# Altium PCB IG-2.PCBDOC (part 3 of 3)
Units mil, origin at the board's own origin, x right, y up, seen from the top; angles counter-clockwise.
Board outline 1834.65 x 964.57 mil, 4 copper layers (Top, GND Plane, Mid1-Ver, Bottom), stack 61.6 mil thick; 34 components, 46 nets, 345 pads, 276 vias.
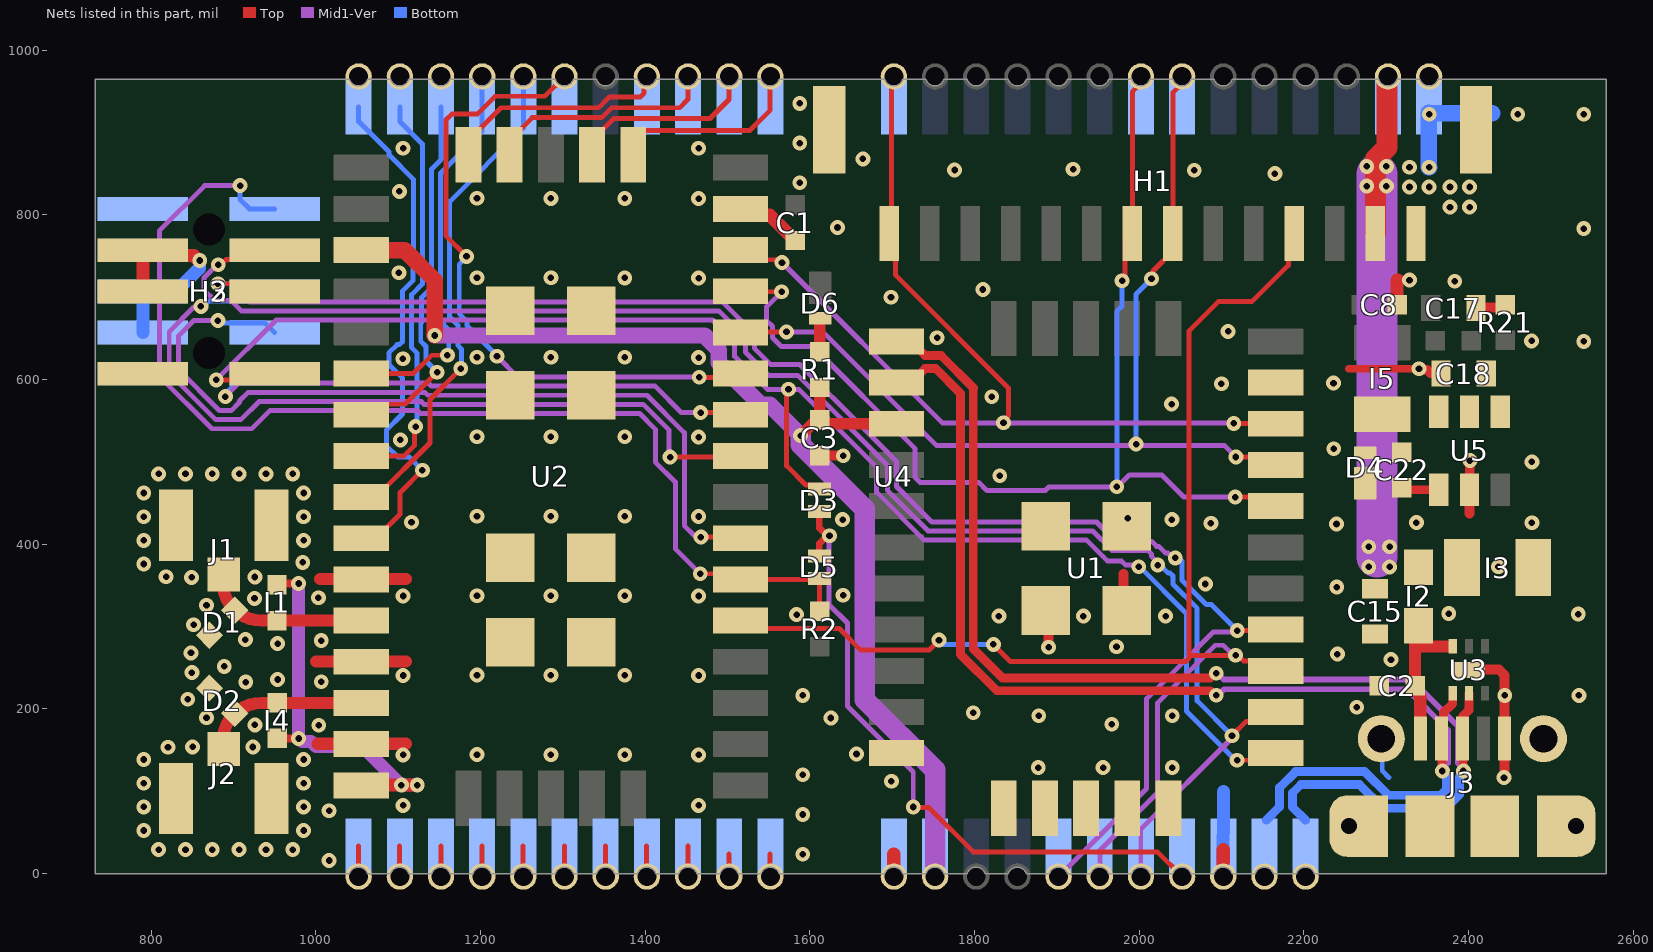
[diagram p4: the nets of this part, all layers, seen from the top]

## Via types
v1: diameter 18, hole 8, Top to Bottom, 276 vias

## Nets (pads, with @x,y where several pads share a name; then routed paths per layer and width w, separated by ;. In a path a pad name is that pad's centre, name@x,y a point inside that pad or via, vN(x,y) a via of type N, cw(c..) or ccw(c..) an arc to the next point about the centre after c; other vN are vias at no path point) (continued)
G12/SWO: H2.6 U1.15 U4.19 | length 1976.4
  Top w6: v1(881.08,716.35) 940.81,716.35 H2.6@950.08,707.09 ; v1(2119.1,295.21) 2171.56,295.21 U1.15@2172.68,296.33
  Mid1-Ver w6: v1(881.08,716.35) 897.43,716.35 919.39,694.38 1493.73,694.38 1532.59,655.52 1532.59,638.06 1552.55,618.11 1587.88,618.11 1665.12,540.87 1705.16,500.83 1705.16,470.1 1748.18,427.08 1948.08,427.08 1971.63,403.53 2015.03,403.53 2021.12,397.44 2023.74,397.44 2032.04,389.15 2034.75,389.15 2040.43,383.46 v1(2043.68,383.46) ; U4.19@1902.09,-3.54 2009.03,103.4 2009.03,212.48 2090.26,293.71 2117.6,293.71 v1(2119.1,295.21)
  Bottom w6: 2052.08,379.95 2052.08,356.07 2081.37,326.79 2087.52,326.79 v1(2119.1,295.21)
G14/SWCLK: H2.4 U1.13 U4.21 | length 1979.5
  Top w6: v1(881.46,739.35) 884.71,739.35 890.94,745.59 938.58,745.59 H2.4@950.08,757.09 ; v1(2112.65,167.51) 2112.65,167.84 2129.39,184.58 2160.93,184.58 U1.13@2172.68,196.33
  Mid1-Ver w6: v1(881.46,739.35) 880.03,739.35 864.08,723.39 864.08,709.31 877.04,696.35 896.57,696.35 909.53,683.38 1489.18,683.38 1521.59,650.97 1521.59,633.5 1549.91,605.19 1585.24,605.19 1694.16,496.28 1694.16,465.54 1743.62,416.08 1943.52,416.08 1967.07,392.53 2010.48,392.53 2014.72,388.29 2014.72,385.67 2022.39,378 v1(2022.39,374.75) ; U4.21@2001.86,-3.54 2001.86,54.01 2112.65,164.8 v1(2112.65,167.51)
  Bottom w6: v1(2022.39,374.75) 2025.64,374.75 2035.43,364.96 2037.57,364.96 2041.08,361.44 2041.08,351.52 2070.33,322.27 2070.33,209.82 v1(2112.65,167.51)
GND: C1.2 C2.2 C3.2 C8.2 C15.2 C17.2 C18.2 D1.2 D2.2 D4.A H1.0 H1.1 H2.3 H2.5 H2.9 H3.3 H3.5 H3.9 J1.2 J1.3 J2.2 J2.3 J3.5 J3.6 J3.7 J3.8 J3.9 R21.1 U1.0 U1.11 U1.21 U1.23 U1.24 U1.25 U1.26 U1.27 U2.0 U2.11 U2.13 U2.15 U2.31 U3.7 U4.1 U4.15 U4.23 U4.37 U4.38 U4.39 U4.40 U4.41 U4.42 U4.43 U4.44 U4.45 U4.46 U4.47 U5.2 | length 1833.7
  Top w6: U4.37@1051.86,6.3 1051.86,33.86 ; U4.38@1101.86,6.3 1101.86,33.86 ; U4.39@1151.86,6.3 1151.86,33.86 ; U4.40@1201.86,6.3 1201.86,33.86 ; U4.41@1251.86,6.3 1251.86,33.86 ; U4.42@1301.86,6.3 1301.86,33.86 ; U4.43@1351.86,6.3 1351.86,33.86 ; U4.44@1401.86,6.3 1401.86,33.86 ; U4.45@1451.86,6.3 1451.86,33.86 ; U4.46@1501.86,-3.54 1501.86,24.02 ; U4.47@1551.86,-3.54 1551.86,24.02 ; v1@1655.85,144.52 v1(1656.62,145.29)
  Top w9: 2254.36,613.08 v1@2342.63,613.08
  Top w11.81: v1(2339.75,613.08) 2340.94,611.89 2349.91,611.89 2353.85,607.95
  Top w12: C3.2@1611.89,507.71 1640.32,507.71 v1(1640.55,507.48) ; U1.0@1886.26,319.57 1889.92,315.89 v1(1889.92,274.85) ; U1.0@1981.02,323.22 1981.02,364.27 ; U3.7@2400.37,247.46 2400.83,247.92 2436.71,247.92 2443.74,240.89 v1@2443.74,124.74 ; 2401.09,437.33 U5.2@2401.09,466.22 2401.32,466.45 2401.32,501.41 v1(2401.55,501.65) ; C17.2@2408.96,686.69 2409.95,687.68 2443.41,687.68 R21.1@2444.4,688.66
  Top w14.88: 1000.39,257.78 1109.25,257.78 ; 1001.97,157.78 1109.25,157.78 ; 1005.51,357.78 1109.25,357.78
  Top w16: H2.5@790.08,707.09 790.08,750.83 H2.3@790.08,757.09 796.58,750.59 851.78,750.59 857.32,745.04 858.7,745.04 v1(859.08,744.65) ; U2.31@1515.8,807.31 1523.55,799.56 1551.23,799.56 C1.2@1582.09,768.7 ; U4.15@1701.86,-3.54 1701.86,24.02 ; U4.23@2101.86,-3.54 2101.95,29.11 ; C8.2@2313.17,690.61 2313.17,720.74 2313.9,720.74
  Bottom w6: J3.6@2295.12,154.69 2295.12,124.79 2303.32,116.59
  Bottom w16: H3.3@790.08,657.09 H3.5@790.08,707.09 830.58,707.09 858.7,735.2 858.7,744.27 v1(859.08,744.65) ; U4.23@2101.86,-3.54 2102.14,99.62
  Bottom w20: v1(2351.99,857.77) 2351.86,857.9 2351.86,924.21 2352.73,923.34 2428.62,923.34
  other v1: 1016.19,15.96 1591.34,23.62 809.13,29.16 841.73,29.16 874.33,29.16 906.93,29.16 939.53,29.16 972.13,29.16 791.02,52.36 985.21,52.36 1591.34,71.85 1016.19,76.39 791.02,81.1 985.21,81.1 1106.02,82.95 1464.96,82.95 791.02,109.84 985.21,109.84 1699.04,112.21 2443.02,116.68 1591.34,120.08 1877.38,128.72 1956.12,128.72 2040.03,128.72 791.02,138.58 985.21,138.58 1106.02,144.15 1285.49,144.49 1375.23,144.43 1464.96,144.15 1195.75,144.54 820.47,153.54 850.39,153.94 923.65,153.75 1003.49,180.29 925.98,180.71 1966.61,181.37 867.32,189.37 1625.52,188.99 1877.93,191.82 2040.03,191.83 1798.48,195.36 2264.13,202.07 844.49,211.81 2443.85,216.45 2533.91,216.45 1591.34,216.54 914.96,232.68 1006.69,233.07 953.6,235.83 1106.02,240.66 1195.75,241.06 1285.49,241 1375.23,240.94 1464.96,240.66 849.61,244.09 888.76,251.7 2305.75,259.95 2240.64,266.61 848.43,268.11 1972.44,275.59 953.6,279.44 1006.69,283.07 914.57,284.25 851.57,302.36 1829.51,312.73 1932.15,312.73 2032.06,312.73 1583.86,314.57 2533.21,315.23 2375.99,315.88 867.32,325.98 925.59,334.25 1003.15,335.04 1106.02,337.18 1375.23,337.46 1464.96,337.18 1195.75,337.57 1285.49,337.51 1640.32,338.12 2239.91,347.97 2080.42,351.78 849.21,359.84 926.06,360.24 818.19,360.66 2436.11,372.81 791.02,376.01 984.25,377.95 791.02,404.75 985.21,404.75 2086.99,425.46 2239.55,424.61 2336.54,426.26 2476.92,426.21 1116.27,426.65 1639.76,429.92 2039.72,429.93 1985.98,431.53 791.02,433.49 985.21,433.49 1195.75,434.08 1285.49,434.03 1375.23,433.97 1464.96,433.69 791.02,462.23 985.21,462.23 1830.52,483.25 809.13,485.43 841.73,485.43 874.33,485.43 906.93,485.43 939.53,485.43 972.13,485.43 2476.92,500.11 2236.13,516.08 1102.76,526.77 1375.23,530.48 1464.96,530.2 1195.75,530.6 1285.49,530.54 2039.31,570.23 1820.91,579.08 2099.8,594.89 2235.91,595.74 1105.77,625.36 1195.75,627.11 1285.49,627.05 1375.23,627.05 1464.96,626.72 2539.77,646.42 2476.53,646.94 1754.59,650.84 2107.88,658.55 1698.58,700.04 1810.14,709.39 2383.13,719.4 2328.2,720.86 1464.96,723.23 1195.75,723.62 1285.49,723.57 1375.23,723.51 1100.88,729.85 2539.77,783.29 1633.54,784.73 2377.43,809.47 2401.22,809.47 1195.75,820.13 1285.49,820.08 1375.23,820.02 1464.96,819.74 1101.55,828.47 2328.21,833.87 2351.99,833.87 2377.43,833.87 2401.22,833.87 1587.8,838.98 2164.71,850.21 2066.71,854.11 1775.74,854.54 1919.71,855.41 2328.21,857.77 1664.44,867.98 1106.02,880.94 1464.96,880.94 1587.8,887.2 2352.15,922.13 2459.72,922.13 2539.77,922.13 1587.8,935.43
GNSS1_ANT: D1.1 I1.2 J1.1 U2.12 | length 204
  Top w14.88: J1.1@886.76,363.19 886.76,354.55 ccw(c934.01,354.55) 934.01,307.3 U2.12@1055.18,307.3
GNSS1_PPS: H1.14 U1.20 U2.30 U4.14 | length 1228.5
  Top w6: U2.30@1515.8,757.31 1527.55,745.56 1560,745.56 1563.44,742.13 v1(1566.14,742.13) ; U4.14@1701.87,966.09 1699.1,963.32 1699.1,780.38 H1.14@1696.33,777.61 1704.14,769.8 1704.14,726.75 1841.21,589.68 1841.21,556.2 1835.2,550.18 v1(1835.2,547.47) ; v1(2114.78,546.84) 2172.17,546.84 U1.20@2172.68,546.33
  Mid1-Ver w6: v1(1566.14,742.13) 1760.8,547.47 v1(1835.2,547.47) 1835.27,547.4 v1@2114.78,547.4 ; U4.14@1701.37,967.39 U4.14@1702.09,968.11
GNSS2_ANT: D2.1 I4.2 J2.1 U2.14 | length 204
  Top w14.88: J2.1@886.76,151.41 886.76,160.06 cw(c934.01,160.06) 934.01,207.3 U2.14@1055.18,207.3
GNSS2_PPS: H1.4 U1.14 U2.21 U4.20 | length 1650.7
  Top w6: U2.21@1515.8,307.31 1525.54,297.57 1635.94,297.57 1662.01,271.49 1744.72,271.49 v1(1756.81,283.58) ; v1(1822.83,278.35) 1843.7,257.48 2056.55,257.48 2060.68,261.61 2060.68,265.12 2060.68,659.2 2096.05,694.57 2136.77,694.57 2181.01,738.81 2181.01,770.16 H1.4@2188.46,777.61 ; 2061.68,265.12 2119.7,265.12 2126.74,258.08 2154.04,258.08 U1.14@2165.79,246.34
  Mid1-Ver w6: U4.20@1952.09,-3.54 1952.09,28.07 2022.03,98.02 2022.03,207.09 2092.34,277.39 2102.02,277.39 2114.29,265.12 v1(2116.99,265.12)
  Bottom w6: v1(1756.81,283.58) 1762.04,278.35 v1(1822.83,278.35)
GPX_G5/SCLK: U2.9 U4.32 | length 614.6
  Top w6: U2.9@1055.18,457.31 1072.89,457.31 1138.65,523.07 1138.65,575.83 v1(1176.11,613.28)
  Bottom w6: v1(1176.11,613.28) 1176.84,614.02 1176.84,637.21 1172.49,641.56 1172.49,666.13 1162.55,676.07 1162.55,816.13 1252.09,905.66 U4.32@1252.09,931.1 U4.32@1252.09,954.72 U4.32@1252.09,968.11
GPX_G6/Rx1/MOSI: U2.6 U4.33 | length 464.8
  Top w6: U2.6@1055.18,607.3 1118.55,607.3 1140.79,629.54 v1(1159.84,629.54)
  Bottom w6: v1(1159.84,629.54) 1161.49,631.19 1161.49,660.58 1151.55,670.52 1151.55,850.96 1202.09,901.49 U4.33@1202.09,931.1 U4.33@1202.09,954.72
GPX_G7/Tx1/MISO: U2.7 U4.34 | length 454
  Top w6: U2.7@1055.18,557.3 1067.92,570.05 1108.32,570.05 v1(1147.27,609.01)
  Bottom w6: v1(1147.27,609.01) 1133.77,622.51 1133.77,640.22 1127.49,646.5 1127.49,668.24 1128.32,669.07 1128.32,699.46 1140.55,711.69 1140.55,855.51 1152.09,867.05 U4.34@1152.09,931.1
GPX_G8/C\S\: U2.8 U4.35 | length 501.7
  Top w6: U2.8@1055.18,507.3 1107.34,507.3 1119.76,519.73 1119.76,541.45 v1(1121.26,542.95)
  Bottom w6: U4.35@1102.09,931.1 1102.09,913.39 1129.55,885.92 1129.55,716.24 1116.49,703.18 1116.49,638.68 1122.77,632.4 1122.77,544.47 v1(1121.26,542.95)
GPX_G9/S\P\I\_\E\N\: U2.10 U4.36 | length 647.8
  Top w6: U2.10@1055.18,407.31 1072.89,407.31 1102.25,436.66 1102.25,462.62 v1(1129.46,489.83)
  Bottom w6: U4.36@1052.09,931.1 1052.09,913.39 1089.02,876.45 1089.02,872.7 1118.55,843.17 1118.55,752.78 1117.88,752.11 1117.88,720.13 1105.08,707.32 1105.08,645.87 1101.56,642.36 1098.73,642.36 1088.77,632.4 1088.77,618.32 1104.89,602.19 1105.28,602.19 1105.28,558.19 1085.76,538.67 1085.76,519.73 1099.56,505.93 1113.36,505.93 v1(1129.46,489.83)
GPX_G10/BOOT: U2.27 U4.31 | length 794.2
  Top w6: v1(1183.07,749.61) 1157.95,774.73 1157.95,915.21 1165.13,922.4 1196.17,922.4 1217.88,944.11 1278.09,944.11 U4.31@1302.09,968.11 ; v1(1465.75,602.76) 1511.26,602.76 U2.27@1515.8,607.31
  Mid1-Ver w6: v1(1220.08,628.35) 1245.42,603.01 1465.5,603.01 v1(1465.75,602.76)
  Bottom w6: v1(1183.07,749.61) 1183.07,748.96 1174.2,740.09 1174.2,679.98 1183.49,670.69 1183.49,665.72 1220.08,629.13 v1(1220.08,628.35)
GPX_G11/SWDIO: H3.2 U2.26 | length 725
  Top w6: v1(1467.32,559.84) 1513.27,559.84 U2.26@1515.8,557.31
  Mid1-Ver w6: v1(890.19,579.27) 906.96,596.05 1136.19,596.05 1137.35,594.88 1137.64,594.88 1140.52,592.01 1412.04,592.01 1444.2,559.84 v1(1467.32,559.84)
  Bottom w6: v1(890.19,579.27) 890.19,582.51 898.08,590.41 898.08,595.59 909.58,607.09 H3.2@950.08,607.09
GPX_G12/SWO: H3.6 U2.25 | length 971.8
  Top w6: v1(1430.32,505.91) 1514.41,505.91 U2.25@1515.8,507.31
  Mid1-Ver w6: v1(860.45,688.9) 859.25,687.7 851.48,687.7 822.07,658.29 822.07,607.78 878.59,551.27 909.02,551.27 930.98,573.23 1128.18,573.23 1131.4,570.01 1397.62,570.01 1428.76,538.86 1428.76,507.46 v1(1430.32,505.91)
  Bottom w6: v1(860.45,688.9) 863.7,688.9 870.39,695.59 938.58,695.59 H3.6@950.08,707.09
GPX_G16/QDEC0.A: U2.38 U4.26 | length 240.1
  Top w6: U2.38@1385.49,873.05 1385.49,890.77 1397.24,902.52 1527.21,902.52 1551.86,927.17 U4.26@1551.86,968.11
GPX_G17/QDEC0.B: U2.39 U4.27 | length 222.6
  Top w6: U2.39@1335.49,873.05 1335.49,890.77 1361.83,917.11 1478.81,917.11 1501.86,940.17 U4.27@1501.86,958.27
GPX_G18/QDEC1.A: U2.41 U4.28 | length 272.6
  Top w6: U2.41@1235.49,873.05 1235.49,890.77 1262.82,918.1 1347.27,918.1 1359.27,930.11 1441.81,930.11 1451.86,940.17 U4.28@1451.86,958.27
GPX_G19/QDEC1.B: U2.42 U4.29 | length 276.3
  Top w6: U2.42@1185.49,873.05 1185.49,890.77 1224.85,930.13 1343.56,930.13 1356.54,943.11 1394.12,943.11 1398.8,947.8 1398.8,964.83 U4.29@1402.09,968.11
GPX_nRESET: D5.A H3.10 R2.2 U2.22 | length 1393.8
  Top w6: v1(1466.93,364.17) 1508.94,364.17 U2.22@1515.8,357.31 1604.76,357.31 1605.73,358.27 D5.A@1611.63,358.27 1611.63,319.03 R2.2@1611.88,318.79
  Mid1-Ver w6: v1(908.14,835.59) 865.11,835.59 810.07,780.54 810.07,604.23 874.03,540.27 922.22,540.27 944.18,562.23 1123.62,562.23 1126.85,559.01 1393.06,559.01 1412.38,539.69 1412.38,499.8 1436.61,475.56 1436.61,394.49 v1(1466.93,364.17)
  Bottom w6: v1(908.14,835.59) 908.14,818.59 919.64,807.09 H3.10@950.08,807.09
GPX_Rx: H1.7 U1.19 U2.28 U4.7 | length 1192.4
  Top w6: U2.28@1515.8,657.31 1516.37,657.87 v1(1571.59,657.87) ; v1(2014.87,722.51) 2016.79,724.42 2016.79,731.92 2040.82,755.95 H1.7@2040.82,777.61 2040.82,948.55 2051.87,959.6 U4.7@2051.87,966.09 ; v1(2117.42,505.96) 2163.05,505.96 U1.19@2172.68,496.33
  Mid1-Ver w6: v1(1571.59,657.87) 1615.73,657.87 1753.88,519.72 1994.26,519.72 v1(1996.13,521.6) ; v1@1996.13,519.72 2103.65,519.72 v1(2117.42,505.96)
  Bottom w6: v1(1996.13,521.6) 1996.13,703.77 v1(2014.87,722.51)
GPX_SWCLK: H3.4 U2.23 | length 1024.4
  Top w6: v1(1467.72,408.66) 1514.45,408.66 U2.23@1515.8,407.31
  Mid1-Ver w6: v1(881.08,671.69) 852,671.69 833.07,652.76 833.07,612.34 883.14,562.27 897.23,562.27 907.29,572.33 907.29,574.17 917.35,584.23 1132.74,584.23 1135.96,581.01 1402.17,581.01 1447.61,535.57 1447.61,422.7 1459.74,410.57 1465.8,410.57 v1(1467.72,408.66)
  Bottom w6: v1(881.08,671.69) 884.33,671.69 887.43,668.59 938.58,668.59 H3.4@950.08,657.09
GPX_Tx: H1.8 U1.18 U2.29 U4.8 | length 1366.1
  Top w6: U2.29@1515.8,707.31 1516.42,706.69 v1(1565.75,706.69) ; v1@1971.13,471.4 v1(1972.78,469.75) ; v1(1979.13,720.08) 1979.13,723.33 1982.8,726.99 1982.8,768.8 H1.8@1991.61,777.61 1991.61,949.34 2001.87,959.6 U4.8@2001.87,966.09 ; v1(2116.7,457.32) 2161.68,457.32 U1.18@2172.68,446.33
  Mid1-Ver w6: v1(1565.75,706.69) 1547.59,688.54 1547.59,671.64 1554.59,664.64 1554.59,650.83 1565.32,640.11 1603.84,640.11 1727.5,516.44 1727.5,481.45 1733.79,475.17 1804.92,475.17 1814.84,465.25 1885.97,465.25 1890.47,469.75 1973.67,469.75 1988.08,484.16 2027.48,484.16 2054.32,457.32 v1(2116.7,457.32)
  Bottom w6: v1(1972.78,469.75) 1972.78,682.86 1979.13,689.21 v1(1979.13,720.08)
IMX_nRESET: D3.A H2.10 U1.12 | length 1856.4
  Top w6: v1(879.22,599.69) 942.68,599.69 H2.10@950.08,607.09 ; v1(1574.02,588.19) 1571.77,585.94 1571.77,495.24 1595.01,472.01 1606.76,472.01 D3.A@1611.63,467.14 ; v1(2118.89,137.72) 2155,137.72 U1.12@2163.61,146.33
  Mid1-Ver w6: v1(879.22,599.69) 951.92,672.38 1481.79,672.38 1508.59,645.58 1508.59,628.12 1548.52,588.19 v1(1574.02,588.19) 1574.45,587.76 1587.05,587.76 1681.16,493.65 1681.16,462.99 1739.06,405.08 1936.14,405.08 1961.69,379.53 1978.49,379.53 1983.07,374.94 1997.19,374.94 v1(1999.49,372.65)
  Bottom w6: v1(1999.49,372.65) 2000.45,372.65 2057.33,315.76 2057.33,197.36 2116.98,137.72 v1(2118.89,137.72)
NetC22_1: C22.1 U5.1 | length 48.3
  Top w10: C22.1@2318.59,473.51 2318.59,473.26 2325.63,466.22 U5.1@2363.69,466.22
NetD6_C: D6.C R1.1 | length 41
  Top w14: R1.1@1611.89,633.69 1612.2,634 1612.2,674.1 D6.C@1612.51,674.41
nRESET: D3.C D5.C U4.22 | length 801.2
  Top w6: v1(1725.59,80.9) 1726.17,80.31 1744.49,80.31 1798.25,26.55 2021.99,26.55 U4.22@2052.09,-3.54
  Top w8: D5.C@1611.63,385.83 1611.63,401.06 1619.02,408.45 1621.97,408.45 v1(1623.88,410.37) 1621.97,412.28 1619.06,412.28 1611.63,419.71 D3.C@1611.63,439.58
  Mid1-Ver w6: v1@1623.32,410.94 1623.32,326.68 1645.67,304.33 1645.67,203.29 1725.59,123.37 v1(1725.59,80.9)
SW: C22.2 D4.C I5.1 U5.6
USB.D_N: J3.2 U1.2 U3.1 U4.24 | length 1527.3
  Top w10.7: 1782.84,583.41 1782.84,266.5 1827.28,222.06 2086.02,222.06 2091.53,216.55 v1(2093.51,216.55)
  Top w10.73: U1.2@1677.61,596.82 1723.37,596.82 1740.01,613.47 1752.79,613.47 1782.82,583.44 ; v1(2368.15,124.69) 2367.54,125.31 2367.54,163.44 J3.2@2366.92,164.05 2369.43,166.56 2369.43,195.28 2380.68,206.53 U3.1@2380.68,218.92
  Mid1-Ver w6.97: v1(2093.51,216.55) 2095.75,216.55 2103.1,223.91 2325.5,223.91 2374.96,174.45 2374.96,134.29 2368.15,127.48 v1(2368.15,124.69)
  Bottom w10.7: U4.24@2154.16,64.83 2170.41,81.09 2170.41,104.47 2189.9,123.96 2273.92,123.96 2302.73,95.15 2365.9,95.15 2373.09,102.34 2373.09,117.77 2368.15,122.72 v1(2368.15,124.69)
USB.D_P: J3.3 U1.1 U3.2 U4.25 | length 1544.7
  Top w10.7: 1798.54,589.97 1798.54,273 1833.78,237.76 2086.02,237.76 2091.53,243.27 v1(2093.51,243.27)
  Top w10.73: U1.1@1677.61,646.82 1722.38,646.82 1740.01,629.2 1759.31,629.2 1798.54,589.97 ; J3.3@2392.51,164.05 2392.51,190.63 2400.37,198.48 U3.2@2400.37,218.92 ; J3.3@2393.13,164.05 2393.13,125.31 v1(2393.74,124.69)
  Mid1-Ver w6.97: v1(2093.51,243.27) 2095.33,243.27 2102.72,235.88 2330.46,235.88 2386.93,179.41 2386.93,134.29 2393.74,127.48 v1(2393.74,124.69)
  Bottom w10.7: U4.25@2202.04,64.83 2186.11,80.76 2186.11,97.97 2196.4,108.26 2267.42,108.26 2296.22,79.45 2372.41,79.45 2388.79,95.84 2388.79,117.77 2393.74,122.72 v1(2393.74,124.69)
USB.VBUS: C2.1 I2.2 J3.1 U3.6 | length 137.1
  Top w15: I2.2@2334.93,287.48 C2.1@2334.93,228.32 2339.24,224.01 2339.24,217.21 2341.23,215.23 J3.1@2341.23,186.89 ; 2344.19,275.93 U3.6@2378.11,275.93
VANT: I1.1 I4.1 U2.16 | length 477
  Top w10: I1.1@952.91,350.64 952.91,352.36 v1(979.16,352.36) ; I4.1@953.1,164.19 v1@978.35,164.17
  Top w15.75: U2.16@1055.18,107.48 v1(1103.94,107.48) v1(1123.23,107.48)
  Mid1-Ver w15.75: v1(979.16,352.36) v1(979.16,164.18) 979.77,164.18 983.49,160.46 994.27,160.46 1000.51,154.22 1057.2,154.22 v1(1103.94,107.48) v1(1123.23,107.48)
VBAT: C3.1 R1.2 U1.3 U2.3 U4.16 | length 1417.6
  Top w14: v1(1588.77,532) C3.1@1602.91,546.14 ; C3.1@1611.89,546.14 U1.3@1691.57,546.14 ; C3.1@1611.89,551.02 R1.2@1611.89,590.39
  Top w20: U2.3@1055.18,757.31 1055.64,756.84 1108.19,756.84 1144.49,720.54 v1(1144.49,653.54)
  Mid1-Ver w20: v1(1144.49,653.54) 1472.07,653.54 1489.59,636.03 1489.59,620.25 1540.65,569.19 1551.59,569.19 v1(1588.77,532)
  Mid1-Ver w25: v1(1588.77,532) 1588.77,520.88 1666.82,442.84 1666.82,211.14 1752.09,125.87 U4.16@1752.09,-3.54
VIN: C15.1 H1.2 I2.1 I3.1 U4.2 | length 659.6
  Top w25: H1.2@2286.88,777.61 2286.88,867.85 2300.88,881.84 2300.88,965.1 U4.2@2301.87,966.09
  Mid1-Ver w50: 2288.91,384.72 2288.91,835.15 2288.91,849.61
  other v1: 2278.67,372.5 2304.1,372.5 2278.67,397.02 2304.1,397.02 2276.35,834.99 2300.14,834.99 2276.35,858.89 2300.14,858.89
VIN_P: C18.1 I3.2 U5.4 U5.5
pads on no net: H2.7 H2.8 H2.11 H2.12 H3.7 H3.8 H3.11 H3.12 J3.4 U1.28 U1.29 U1.31 U1.32 U2.1 U2.2 U2.4 U2.5 U2.17 U2.18 U2.19 U2.20 U2.24 U2.33 U2.34 U2.35 U2.36 U2.37 U3.3 U3.4 U3.5 U4.4

## Polygon pours and split planes (outlines as drawn)
GND on Top "GND_L01_P014" (solid, remove dead copper, pour order 14): 754.72,20.35 754.72,944.88 2548.97,944.88 2548.97,20.35
GND on Top "RF_GND_L-01_P-001" (solid, pour order 12): 754.72,507.87 1030.03,507.87 1030.03,20.08 754.72,20.08
GND on Top "NONET_L-01_P-001" (solid, pour order 15): 2327.78,954.72 2327.78,748.84 2301.36,722.42 2301.36,678.8 2553.66,678.8 2554.63,679.78 2554.63,954.72
+3.3V on Mid1-Ver "+3.3V_L03_P010" (solid, remove dead copper, pour order 10): 753.94,9.84 753.94,954.72 2550.58,954.72 2550.58,9.84
GND on Mid1-Ver "RF_GND_L-03_P-001" (solid, pour order 9): 746.06,507.87 1030.03,507.87 1030.03,12.99 746.06,12.99
GND on Bottom "GND_L04_P013" (solid, remove dead copper, pour order 13): 754.72,20.35 754.72,944.88 2548.97,944.88 2548.97,20.35
GND on GND Plane (split plane): 616 vertices, not listed, extent 742.37,10.09 2556.84,954.48

## Other copper
Top:
  region net +3.3V: 2329.55,631.13 2322.8,624.38 2219.33,624.38 2213.03,631.13 2143.8,631.13 2143.8,661.79 2225.86,743.86 2225.86,753 2249.48,753 2249.48,740.91 2291.52,698.88 2291.52,672.55 2332.93,672.55 2332.93,701.46 2371.65,701.46 2371.65,636.72 2366.07,631.13
  region net VIN: 2270.57,336.25 2408.42,336.25 2408.42,406.22 2357.24,406.22 2270.57,406.22
  region net VIN_P: 2500.34,406.15 2486.38,406.15 2486.38,337.53 2557.86,337.53 2557.86,623.7 2450.3,623.7 2419.16,623.7 2418.91,623.37 2414.34,623.48 2414.56,609.66 2389.28,584.38 2389.28,521.02 2500.34,521.02
  region net SW: 2260.43,602.42 2260.43,507.62 2375.59,507.62 2375.59,576.83 2329.33,576.83 2329.33,602.42
Mid1-Ver:
  region net +3.3V: 2234.62,734.78 2234.62,671.93 2224.77,662.08 2169.31,662.08 2157.79,673.6 2218.98,734.78
Bottom:
  region net +3.3V: 2234.62,734.78 2234.62,671.93 2224.77,662.08 2169.31,662.08 2157.79,673.6 2218.98,734.78

## Silkscreen, mask and mechanical layers (free items; w line width, h text height)
Silkscreen Top:
  region: 2035.16,390.13 cw(c1938.55,390.13) 2035.16,390.27 cw(c2030.93,390.26) 2035.16,390.26 cw(c2030.93,390.26) 2026.71,390.26 ccw(c1938.55,390.13) 2026.71,390.13 cw(c2030.93,390.13)
  region: 1934.4,344.71 1934.4,325.1 1942.81,325.1 1942.81,346
  region: 1938.75,458.22 1926.23,437.03 1934.45,433.41 1934.45,426.06 1942.79,427.07 1942.79,433.43 1950.83,436.85
  region: 1987.08,420.74 1965.89,433.27 1962.27,425.04 1961.29,425.04 1962.29,416.7 1965.71,408.67
  region: 1961.34,425.02 1952.66,424.73 1941.39,423.71 1935.91,422.97 1926.56,421.18 1921.44,419.86 1914.97,417.63 1910.78,415.48 1908.57,414.08 1907.02,412.85 1905.35,411.25 1904.27,409.65 1903.38,408.22 1902.85,406.8 1902.51,405.36 1902.39,403.99 1902.39,402.39 1902.57,401.26 1903.16,399.44 1903.86,397.86 1904.94,396.39 1906.74,394.48 1908.44,393.06 1910.46,391.66 1913.57,390.03 1917.02,388.43 1921.03,386.88 1924.96,385.57 1928.65,384.42 1932.26,383.43 1932.26,392.2 1926.76,393.76 1921.57,395.56 1917.27,397.4 1913.94,399.18 1912.63,400.24 1911.37,401.62 1910.92,402.54 1910.74,403.43 1910.74,404.41 1911.25,405.39 1912.18,406.42 1913.41,407.41 1914.74,408.25 1916.5,409.15 1918.55,410.03 1920.29,410.64 1922.21,411.32 1924.73,411.99 1927.62,412.8 1931.74,413.68 1936.07,414.45 1940.26,415.06 1946.03,415.71 1953.11,416.41 1962.26,416.92
  region: 1934.4,410.84 1934.4,359.9 1942.81,361.18 1942.81,412.13
  region: 1909.85,346.75 1922.19,347.09 1932.95,347.98 1941.28,349.1 1950.63,350.9 1955.75,352.21 1962.22,354.44 1966.41,356.59 1968.62,358 1970.17,359.22 1971.84,360.82 1972.92,362.42 1973.81,363.86 1974.34,365.28 1974.68,366.71 1974.8,368.08 1974.8,369.68 1974.62,370.81 1974.03,372.63 1973.33,374.21 1972.25,375.68 1970.45,377.59 1968.75,379.01 1966.73,380.41 1963.62,382.05 1960.17,383.65 1956.16,385.19 1952.23,386.5 1948.54,387.65 1944.93,388.64 1944.93,379.87 1950.43,378.31 1955.63,376.51 1959.92,374.68 1963.25,372.9 1964.56,371.84 1965.82,370.45 1966.27,369.54 1966.45,368.64 1966.45,367.67 1965.94,366.68 1965.01,365.65 1963.79,364.67 1962.46,363.82 1960.69,362.92 1958.65,362.04 1956.9,361.43 1954.98,360.75 1952.46,360.08 1949.57,359.27 1945.45,358.39 1941.12,357.62 1936.93,357.01 1931.16,356.36 1924.08,355.66 1909.85,355
  text "IG-2.1.0" at 2557.83,630.43 h65 r90
  text "1" at 739.68,380.18 h98.43
  text "2" at 739.68,48.32 h98.43
Silkscreen Bottom:
  text "'.PcbRevision'" at 2367.89,230.86 h80
Dimensions:
  drawing of 295 lines, arcs and shapes, not listed
  text "Layer" at 3112.02,1385.56 h60
  text "Name" at 3521.93,1385.56 h60
  text "Material" at 4691.6,1385.56 h60
  text "Thickness" at 5551.37,1385.56 h60
  text "Constant" at 6201.2,1385.56 h60
  text "Board Layer Stack" at 6771.06,1385.56 h60
  text "Silkscreen Top" at 3521.93,1265.56 h60
  text "Solder Mask Top" at 3521.93,1145.56 h60
  text "Solder Resist" at 4691.6,1145.56 h60
  text "0.40mil" at 5551.37,1145.56 h60
  text "3.5" at 6201.2,1145.56 h60
  text "1" at 3112.02,1025.56 h60
  text "Top" at 3521.93,1025.56 h60
  text "2.10mil" at 5551.37,1025.56 h60
  text "Dielectric1" at 3521.93,905.56 h60
  text "PP-006" at 4691.6,905.56 h60
  text "8.00mil" at 5551.37,905.56 h60
  text "4.1" at 6201.2,905.56 h60
  text "2" at 3112.02,785.56 h60
  text "GND Plane" at 3521.93,785.56 h60
  text "0.70mil" at 5551.37,785.56 h60
  text "Dielectric3" at 3521.93,665.56 h60
  text "Core-009" at 4691.6,665.56 h60
  text "40.00mil" at 5551.37,665.56 h60
  text "4.5" at 6201.2,665.56 h60
  text "3" at 3112.02,545.56 h60
  text "Mid1-Ver" at 3521.93,545.56 h60
  text "0.70mil" at 5551.37,545.56 h60
  text "Dielectric2" at 3521.93,425.56 h60
  text "PP-006" at 4691.6,425.56 h60
  text "8.00mil" at 5551.37,425.56 h60
  text "4.1" at 6201.2,425.56 h60
  text "4" at 3112.02,305.56 h60
  text "Bottom" at 3521.93,305.56 h60
  text "2.10mil" at 5551.37,305.56 h60
  text "Solder Mask Bottom" at 3521.93,185.56 h60
  text "Solder Resist" at 4691.6,185.56 h60
  text "0.40mil" at 5551.37,185.56 h60
  text "3.5" at 6201.2,185.56 h60
  text "Silkscreen Bottom" at 3521.93,65.56 h60
Drill Drawing:
  circle w5: c776.74,-364.41 r19.44
  lines w5: 722.68,-760.1 2972.08,-760.1 ; 722.68,-322.6 2972.08,-322.6 ; 1041.35,-847.6 1041.35,-235.1 ; 1445.75,-847.6 1445.75,-235.1 ; 2228.01,-847.6 2228.01,-235.1 ; 2520.44,-847.6 2520.44,-235.1 ; 722.68,-847.6 2972.08,-847.6 2972.08,-235.1 722.68,-235.1 722.68,-847.6 ; 757.29,-733.85 796.18,-733.85 796.18,-694.97 757.29,-694.97 757.29,-733.85 ; 757.29,-636.63 767.02,-636.63 776.74,-646.35 786.46,-636.63 796.18,-636.63 786.46,-626.91 796.18,-617.19 786.46,-617.19 776.74,-607.47 767.02,-617.19 757.29,-617.19 767.02,-626.91 757.29,-636.63 ; 757.29,-558.85 776.74,-549.13 796.18,-558.85 786.46,-539.41 796.18,-519.97 776.74,-529.69 757.29,-519.97 767.02,-539.41 757.29,-558.85 ; 757.29,-432.47 796.18,-432.47 776.74,-471.35 757.29,-432.47
  text "Symbol" at 775.18,-296.35 h42
  text "Hit Count" at 1067.6,-296.35 h42
  text "Finished Hole Size" at 1472,-296.35 h42
  text "Plated" at 2254.26,-296.35 h42
  text "Hole Type" at 2546.69,-296.35 h42
  text "2" at 1067.6,-383.85 h35
  text "19.69mil (0.500mm)" at 1472,-383.85 h35
  text "PTH" at 2254.26,-383.85 h35
  text "Slot" at 2546.69,-383.85 h35
  text "2" at 1067.6,-471.35 h35
  text "33.47mil (0.850mm)" at 1472,-471.35 h35
  text "PTH" at 2254.26,-471.35 h35
  text "Round" at 2546.69,-471.35 h35
  text "2" at 1067.6,-558.85 h35
  text "38.98mil (0.990mm)" at 1472,-558.85 h35
  text "NPTH" at 2254.26,-558.85 h35
  text "Round" at 2546.69,-558.85 h35
  text "47" at 1067.6,-646.35 h35
  text "23.00mil (0.584mm)" at 1472,-646.35 h35
  text "PTH" at 2254.26,-646.35 h35
  text "Round" at 2546.69,-646.35 h35
  text "276" at 1067.6,-733.85 h35
  text "8.00mil (0.203mm)" at 1472,-733.85 h35
  text "PTH" at 2254.26,-733.85 h35
  text "Round" at 2546.69,-733.85 h35
  text "329 Total" at 1067.6,-821.35 h35
  text "Slot definitions :" at 775.18,-904.26 h35
  text "Routed Path Length" at 1375.25,-904.26 h35
  text "= Calculated from tool start centre position to tool end centre position." at 2016.13,-904.26 h35
  text "Hole Length" at 1375.25,-960.91 h35
  text "= Routed Path Length + Tool Size = Slot length as defined in the PCB layout" at 1777.05,-960.91 h35
Board Outline:
  lines w5: 2566.7,964.57 2362.8,964.57 cw(c2351.86,968.11) 2340.92,964.57 2312.8,964.57 cw(c2301.86,968.11) 2290.92,964.57 2262.8,964.57 cw(c2251.86,968.11) 2240.92,964.57 2212.8,964.57 cw(c2201.86,968.11) 2190.92,964.57 2162.8,964.57 cw(c2151.86,968.11) 2140.92,964.57 2112.8,964.57 cw(c2101.86,968.11) 2090.92,964.57 2062.8,964.57 cw(c2051.86,968.11) 2040.92,964.57 2012.8,964.57 cw(c2001.86,968.11) 1990.92,964.57 1962.8,964.57 cw(c1951.86,968.11) 1940.92,964.57 1912.8,964.57 cw(c1901.86,968.11) 1890.92,964.57 1862.8,964.57 cw(c1851.86,968.11) 1840.92,964.57 1812.8,964.57 cw(c1801.86,968.11) 1790.92,964.57 1762.8,964.57 cw(c1751.86,968.11) 1740.92,964.57 1712.8,964.57 cw(c1701.86,968.11) 1690.92,964.57 1562.8,964.57 cw(c1551.86,968.11) 1540.92,964.57 1512.8,964.57 cw(c1501.86,968.11) 1490.92,964.57 1462.8,964.57 cw(c1451.86,968.11) 1440.92,964.57 1412.8,964.57 cw(c1401.86,968.11) 1390.92,964.57 1362.8,964.57 cw(c1351.86,968.11) 1340.92,964.57 1312.8,964.57 cw(c1301.86,968.11) 1290.92,964.57 1262.8,964.57 cw(c1251.86,968.11) 1240.92,964.57 1212.8,964.57 cw(c1201.86,968.11) 1190.92,964.57 1162.8,964.57 cw(c1151.86,968.11) 1140.92,964.57 1112.8,964.57 cw(c1101.86,968.11) 1090.92,964.57 1062.8,964.57 cw(c1051.86,968.11) 1040.92,964.57 732.28,964.57 732.28,0 1040.92,0 cw(c1051.86,-3.54) 1062.8,0 1090.92,0 cw(c1101.86,-3.54) 1112.8,0 1140.92,0 cw(c1151.86,-3.54) 1162.8,0 1190.92,0 cw(c1201.86,-3.54) 1212.8,0 1240.92,0 cw(c1251.86,-3.54) 1262.8,0 1290.92,0 cw(c1301.86,-3.54) 1312.8,0 1340.92,0 cw(c1351.86,-3.54) 1362.8,0 1390.92,0 cw(c1401.86,-3.54) 1412.8,0 1440.92,0 cw(c1451.86,-3.54) 1462.8,0 1490.92,0 cw(c1501.86,-3.54) 1512.8,0 1540.92,0 cw(c1551.86,-3.54) 1562.8,0 1690.92,0 cw(c1701.86,-3.54) 1712.8,0 1740.92,0 cw(c1751.86,-3.54) 1762.8,0 1790.92,0 cw(c1801.86,-3.54) 1812.8,0 1840.92,0 cw(c1851.86,-3.54) 1862.8,0 1890.92,0 cw(c1901.86,-3.54) 1912.8,0 1940.92,0 cw(c1951.86,-3.54) 1962.8,0 1990.92,0 cw(c2001.86,-3.54) 2012.8,0 2040.92,0 cw(c2051.86,-3.54) 2062.8,0 2090.92,0 cw(c2101.86,-3.54) 2112.8,0 2140.92,0 cw(c2151.86,-3.54) 2162.8,0 2190.92,0 cw(c2201.86,-3.54) 2212.8,0 2566.93,0 2566.93,964.57

## Dimensions
2566.93,0 to 2566.7,964.57 on Dimensions
732.28,0 to 2566.93,0 on Dimensions

## Text inside footprints (layer, text, board x,y; h text height)
U1: Silkscreen Top "1" at 1747.4,634.53 h40; Silkscreen Top "11" at 1747.4,134.53 h40; Silkscreen Top "12" at 2086.06,134.53 h40; Silkscreen Top "22" at 2085,634.53 h40
U2: Silkscreen Top "1" at 1099.43,843.8 h40; Silkscreen Top "16" at 1099.43,93.8 h40; Silkscreen Top "17" at 1434.43,93.8 h40; Silkscreen Top "32" at 1434.43,843.8 h40
U4: Silkscreen Bottom "36" at 1065.2,885.83 h45 r90; Silkscreen Bottom "26" at 1565.2,885.83 h45 r90; Silkscreen Bottom "47" at 1538.98,78.74 h45 r270; Silkscreen Bottom "37" at 1038.98,78.74 h45 r270; Silkscreen Bottom "C" at 2356.88,176.96 h30; Silkscreen Bottom "2026" at 2321,171.18 h50; Silkscreen Bottom "SENSE" at 1130.65,235.87 h80; Silkscreen Bottom "INERTIAL" at 1462.85,235.94 h80; Silkscreen Bottom "IS-IG-2.1" at 2358.66,687.58 h150; Silkscreen Bottom "1" at 2338.58,866.14 h45 r270; Silkscreen Bottom "14" at 1688.98,846.46 h45 r270; Silkscreen Bottom "25" at 2188.98,78.74 h45 r270; Silkscreen Bottom "15" at 1688.98,78.74 h45 r270